# Altium PCB ThietbiTN.PcbDoc
Units mm, origin at the board's own origin, x right, y up, seen from the top; angles counter-clockwise.
Board outline 65.46 x 32 mm, 2 copper layers (Top Layer, Bottom Layer); 45 components, 33 nets, 146 pads, 26 vias.
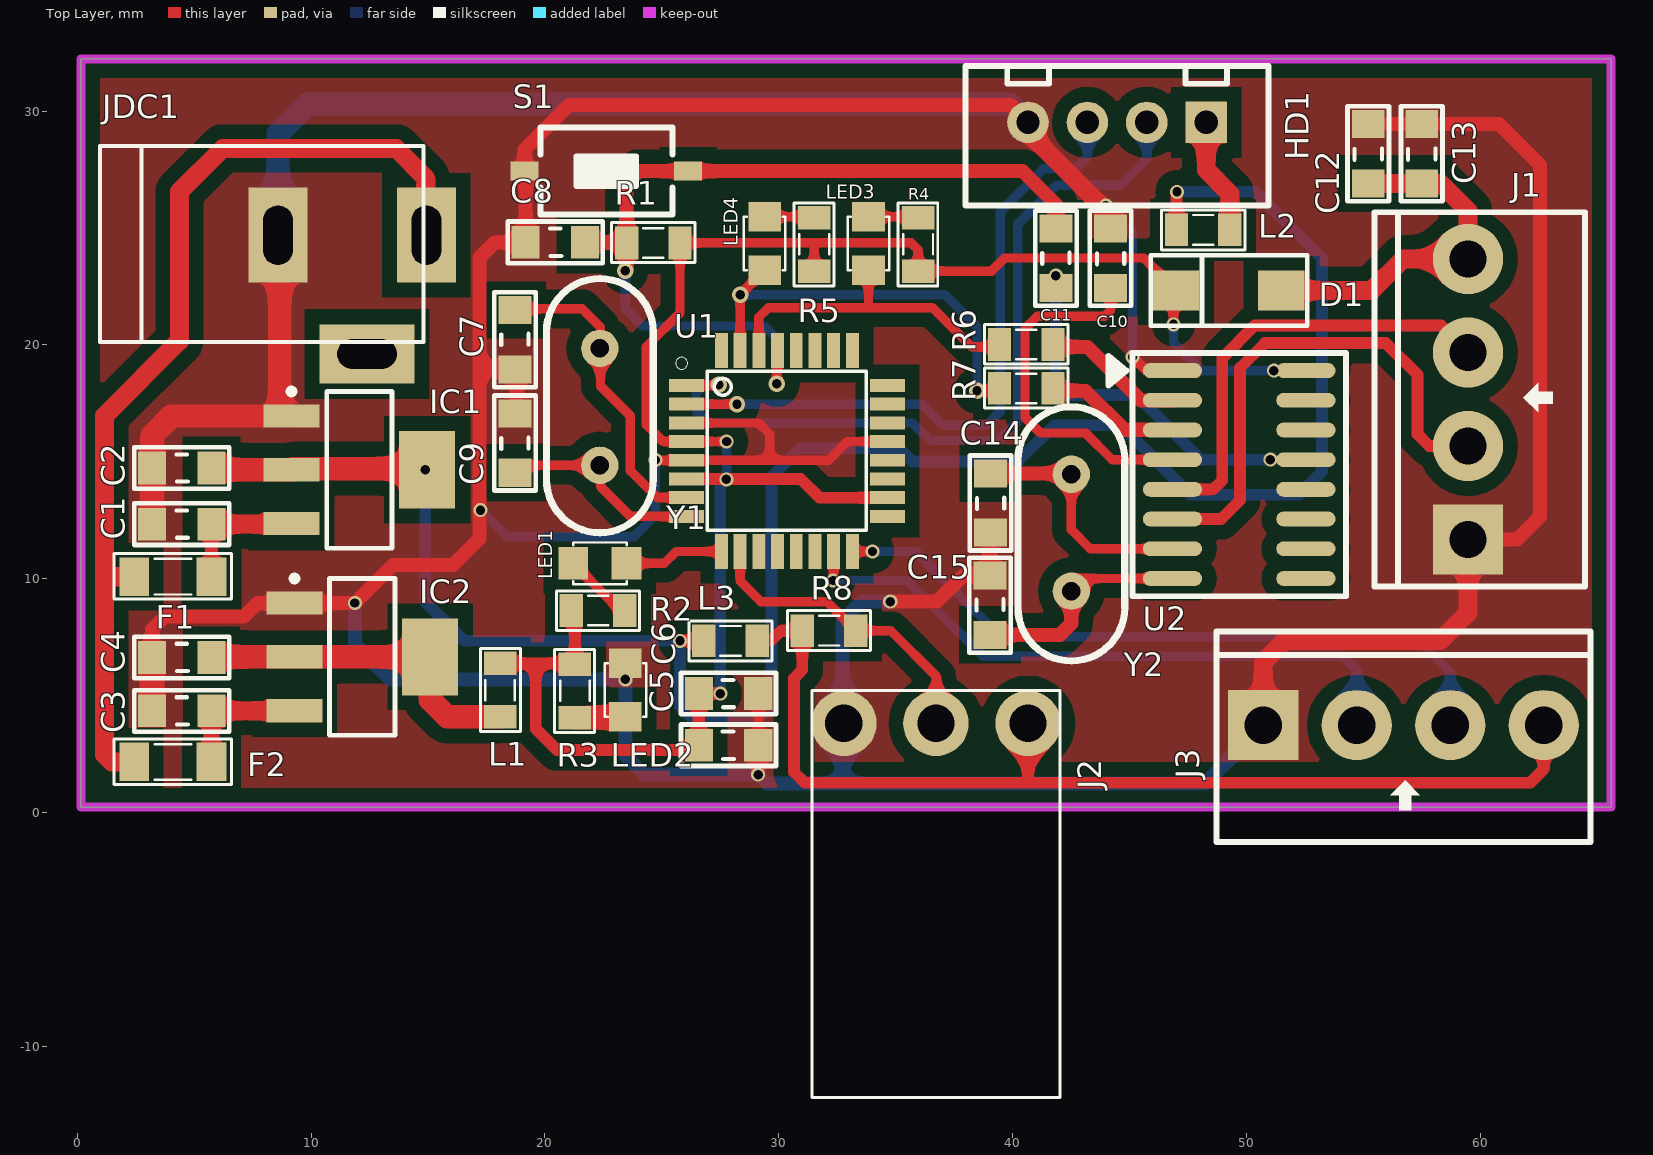
[diagram p0: Top Layer view]
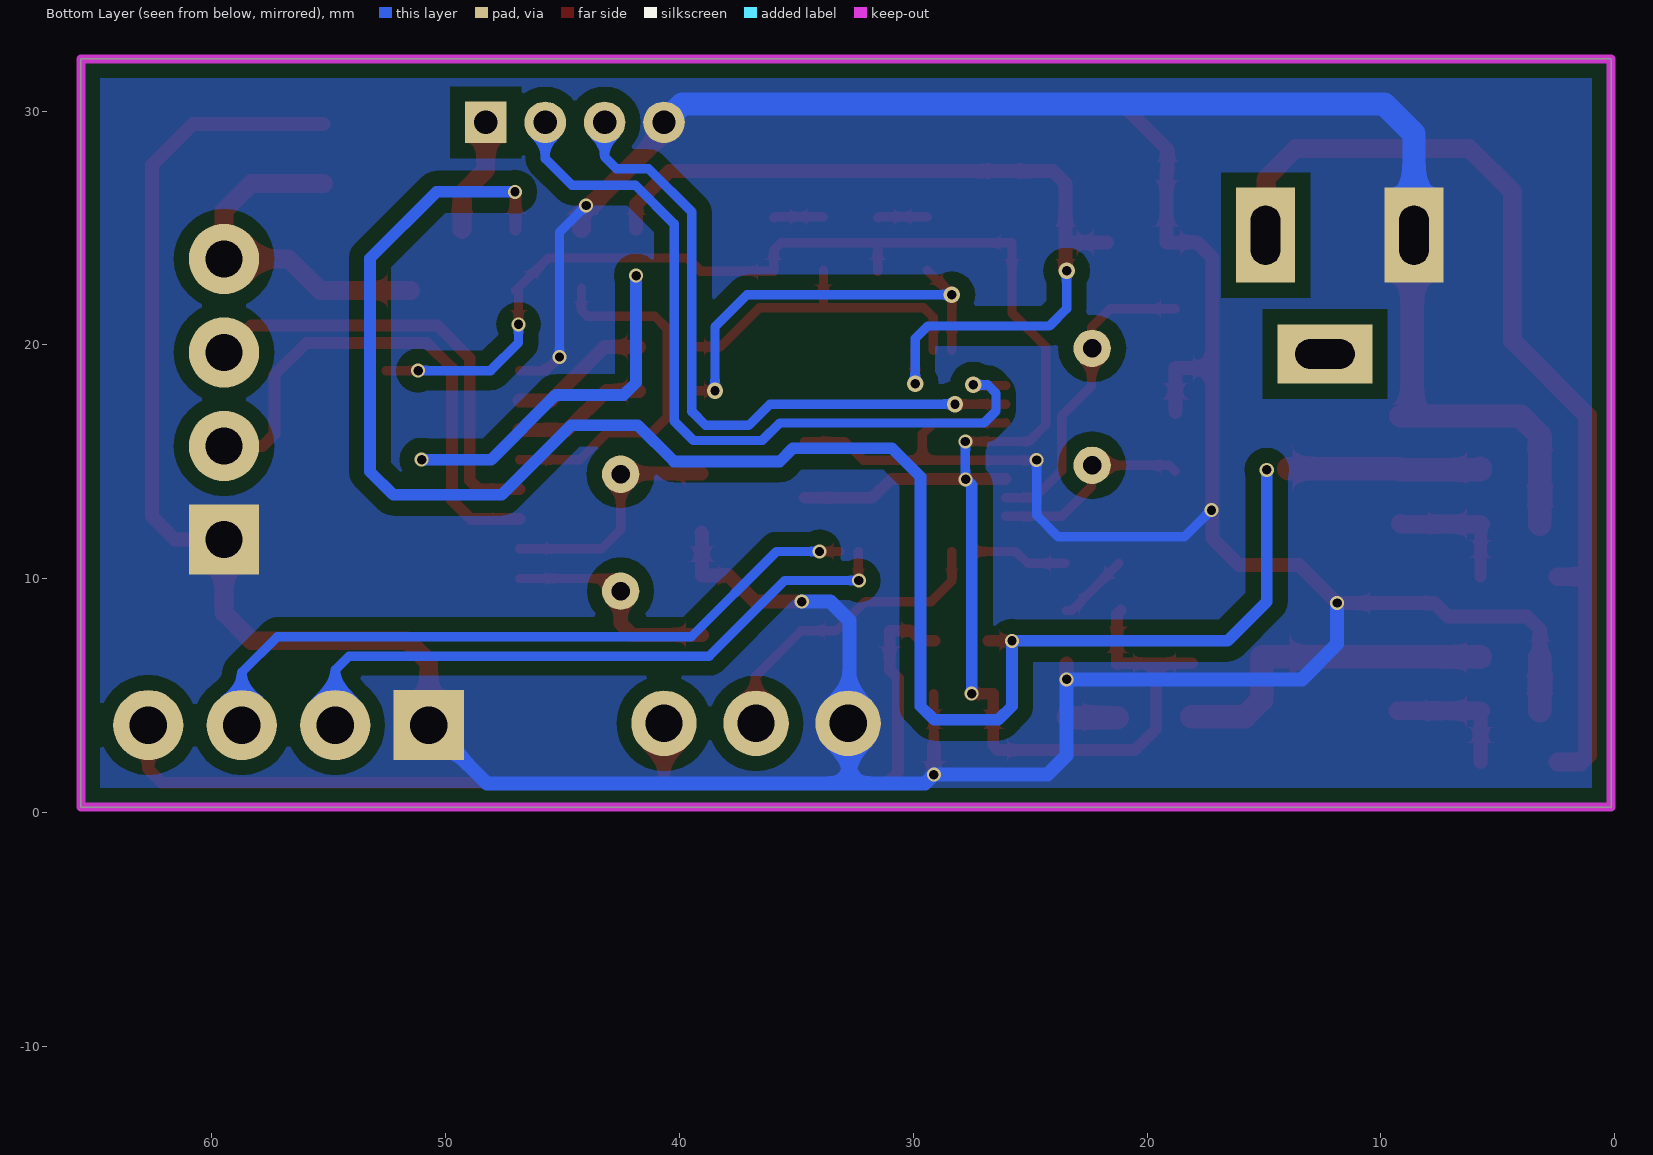
[diagram p1: Bottom Layer view, seen from below]
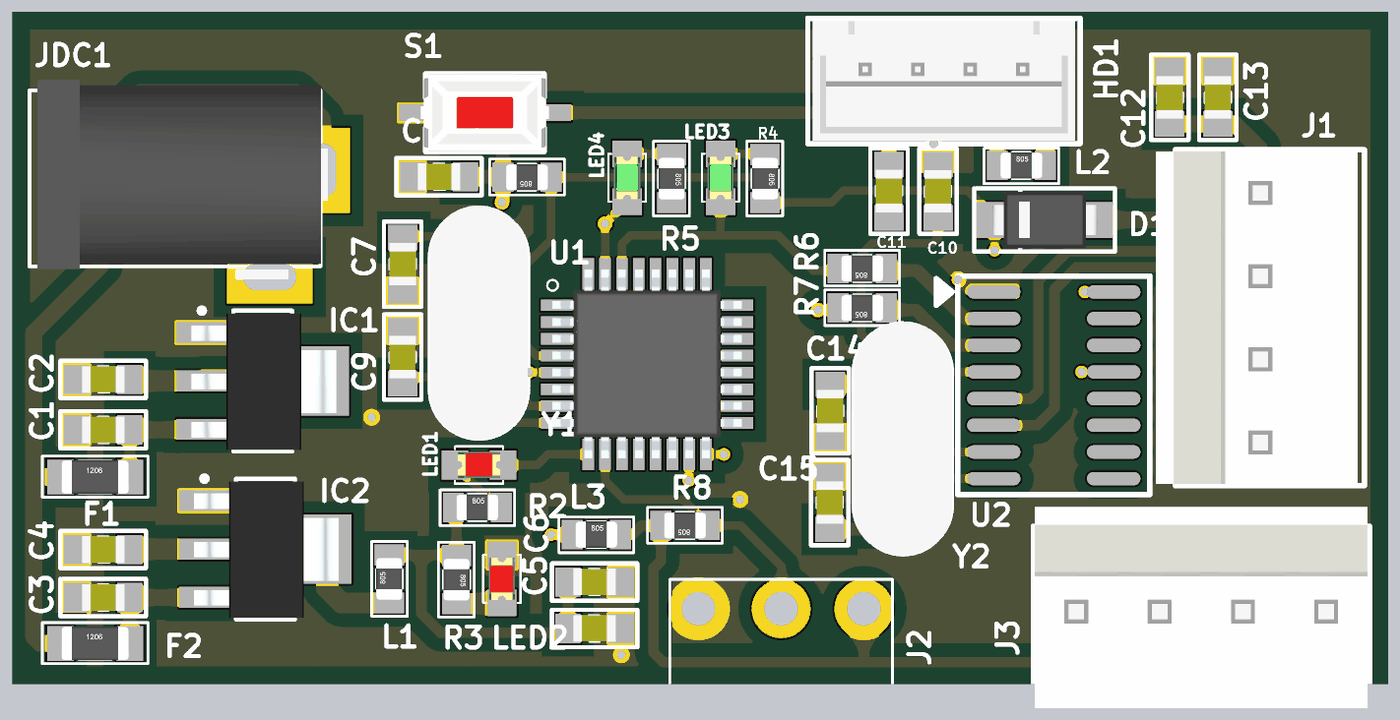
[diagram p2: 3D render of the assembled board from above, using the file's embedded part models]

## Layer stack, top to bottom
Top Solder: solder mask 0.0102, Solder Resist, Dk 3.5
Top Layer: signal copper 0.0356
Dielectric 1: dielectric 0.32, FR-4, Dk 4.8
Bottom Layer: signal copper 0.0356
Bottom Solder: solder mask 0.0102, Solder Resist, Dk 3.5

## Board outline
0.152,0.229 65.608,0.229 65.608,32.233 0.152,32.233

## Design rules (kind name [scope] priority, off if disabled: settings)
Clearance [All] p1: gap=0.254 ignorepadtopadclearanceinfootprint=FALSE except(0: Arc-Hole Track-Hole SMDPad-Hole THPad-Hole Via-Hole Fill-Hole Poly-Hole Region-Hole Text-Hole; 0.635: Arc-Fill Arc-Poly Arc-Region Track-Fill Track-Poly Track-Region SMDPad-Fill SMDPad-Poly SMDPad-Region THPad-Fill THPad-Poly THPad-Region Via-Fill Via-Poly Via-Region Fill-Fill Fill-Poly Fill-Region Poly-Poly Poly-Region Region-Region)
PolygonConnect [All] p1: connectstyle=Direct reliefconductorwidth=0.254 reliefentries=4 polygonreliefangle="90 Angle" airgapwidth=0.254
RoutingVias [All] p1: holewidth=0.6 width=0.8 viastyle="Through Hole" minholewidth=0.4 minwidth=0.6 maxholewidth=0.7 maxwidth=1
SolderMaskExpansion [All] p1: expansion=0.102
Width [All] p1: maxlimit=1 minlimit=0.25 preferedwidth=0.254
30 further rules are at their usual default settings.

## Classes and differential pairs
component class "U_[05] Sensor": J2 J3 L L3 R8 S
component class "U_[04] CH340": C10 C11 C14 C15 D1 J1 LED3 LED4 R4 R5 R6 R7 U2 Y2
component class "U_[03] HMI Screen": HD1 L2
component class "U_[02] MCU": C5 C6 C7 C8 C9 L1 LED1 LED2 R1 R2 R3 S1 U1 Y1
component class "U_[01] Power Supply": C1 C2 C3 C4 F1 F2 IC1 IC2 JDC1

## Components (designator, comment, footprint, x,y, rotation, side; value= is the part's Value field where it differs from the comment)
C1 "10uF/16V" CAP_0805 4.47,12.356 r0 top value=33p
C2 "10uF/16V" CAP_0805 4.47,14.757 r0 top value=33p
C3 "10uF/16V" CAP_0805 4.47,4.369 r0 top value=33p
C4 "10uF/16V" CAP_0805 4.47,6.655 r0 top value=33p
C5 "10uF" CAP_0805 27.856,2.847 r180 top value=33p
C6 "104" CAP_0805 27.856,5.056 r180 top value=33p
C7 "Capacitor Ceramic" CAP_0805 18.694,20.218 r90 top value=33p
C8 "10uF/16V" CAP_0805 20.447,24.409 r0 top value=33p
C9 "Capacitor Ceramic" CAP_0805 18.745,15.799 r270 top value=33p
C10 "104" CAP_0805 44.221,23.698 r270 top value=33p
C11 "104" CAP_0805 41.834,23.698 r90 top value=33p
C12 "104" CAP_0805 55.245,28.169 r270 top value=33p
C13 "10uF" CAP_0805 57.531,28.169 r270 top value=33p
C14 "22pF" CAP_0805 39.091,13.233 r270 top value=33p
C15 "22pF" CAP_0805 39.014,8.865 r90 top value=33p
D1 "1N5819" "DO-214AB SMA" 51.41,22.327 r180 top value=1N4007
F1 "Fuse" RES-SMD-1206 4.089,10.084 r0 top
F2 "Fuse" RES-SMD-1206 4.089,2.159 r0 top
HD1 "HMI" CON_4P 48.285,29.515 r180 top
IC1 "LM1117-5V" SOT223-4N 12.065,14.656 r0 top value=LM317
IC2 "LM1117-5V" SOT223-4N 12.192,6.655 r0 top value=LM317
J1 "PWR" Hed4V_3.96 59.485,11.672 r90 top value="Header 4"
J2 "DS18B20" KF3-3.96-T1 36.728,3.81 r0 top
J3 "HX711" Hed4V_3.96 50.725,3.734 r0 top value="Header 4"
JDC1 "Jac DC" DC-IN 11.76,22.149 r0 top
L1 "100uH" RES-SMD-0805 18.085,5.232 r90 top value="150 mH"
L2 "100uH" RES-SMD-0805 48.158,24.917 r0 top value="150 mH"
L3 "100uH" RES-SMD-0805 27.94,7.341 r0 top value="150 mH"
LED1 "LED" LED-0805-Red 21.209,10.655 r0 top value="LED 3 ly Single Colour"
LED2 "LED" LED-0805-Red 23.444,4.089 r90 top value="LED 3 ly Single Colour"
LED3 "LED" LED-0805-Green 33.845,25.478 r270 top value="LED 3 ly Single Colour"
LED4 "LED" LED-0805-Green 29.4,25.478 r270 top value="LED 3 ly Single Colour"
R1 "10k" RES-SMD-0805 24.638,24.359 r180 top
R2 "1k" RES-SMD-0805 22.276,8.636 r0 top
R3 "1k" RES-SMD-0805 21.285,5.196 r270 top
R4 "1k" RES-SMD-0805 35.966,24.297 r270 top
R5 "1k" RES-SMD-0805 31.521,24.297 r270 top
R6 "1k" RES-SMD-0805 40.589,20.015 r180 top
R7 "1k" RES-SMD-0805 40.589,18.136 r180 top
R8 "4k7" RES-SMD-0805 32.156,7.772 r180 top
S1 "SW-SMD" SW-SMD 22.631,27.432 r180 top
U1 "ATmega328-AU" "TQFP 32" 30.353,15.519 r0 top
U2 "CH340G" SO16 49.699,14.453 r0 top
Y1 "8Mhz" XTAL 22.352,17.399 r90 top
Y2 "12MHz" XTAL 42.52,11.913 r270 top

## Footprints (in the part's own frame and the unit in brackets; to place one, negate y for a bottom-side part, rotate by r counter-clockwise, add the part's x,y. Pads: shape width x height; smd on the part's side, far side on the other; paste and mask are expansions set on the pad)
CAP_0805 [mm]
  rect 1.2x1.4 smd: 1(-1.27,-0.025) 2(1.27,-0.025)
  silkscreen extent -2.03,-0.91 2.03,0.86, body extent -1.01,-0.66 1.01,0.61, height 0.61
CON_4P [mil]
  rect 70x70 hole 39.37 unplated: 1(0,0)
  round 70 hole 39.37 unplated: 2(100,0) 3(200,0)
  round 70 hole 39.37 unplated mask+4: 4(300,0)
  silkscreen extent -105,-95 405,140, body extent -96,-90 396,134, height 276
DC-IN [mil] "Jac DC input"
  rect 100x160 hole 50 slot 100 at 90 deg: 1(125,100) 2(-125,100)
  rect 160x100 hole 50 slot 100 at 0 deg: 3(25,-100)
  silkscreen extent -425,-80 120,250, body extent -410,-105 134,269, height 434
"DO-214AB SMA" [mm]
  rect 2x1.7 smd: 1(-0.092,0) 2(4.408,0)
  silkscreen extent -1.2,-1.5 5.5,1.51, body extent -0.37,-1.35 4.63,1.35, height 2.28
Hed4V_3.96 [mm]
  rect 3x3 hole 1.6 mask+0.102: 1(0,0)
  round 3 hole 1.6 mask+0.102: 2(4,0) 3(8,0) 4(12,0)
  silkscreen extent -2,-5 14,4, body extent -1.93,-4.67 13.91,4.93, height 13.9
KF3-3.96-T1 [mm] "3,96mm - modular - blue - Horizontal wire entry - Pressure clamp - 10mm height - 03p"
  round 2.8 hole 1.6: 1(-3.937,0) 2(0,0) 3(3.937,0)
  silkscreen extent -5.3,-16 5.3,1.4
LED-0805-Green [mil]
  rect 50x55 smd: 1(0,0) 2(90,0)
  silkscreen extent 0,-35 90,35, body extent 5,-25 85,25, height 43
LED-0805-Red [mil]
  rect 50x55 smd: 1(0,0) 2(90,0)
  silkscreen extent 0,-35 90,35, body extent 5,-25 85,25, height 43
RES-SMD-0805 [mil]
  rect 39.37x55 smd: 1(-45,0) 2(45,0)
  silkscreen extent -70,-34 70,33, body extent -39,-25 39,25, height 31
RES-SMD-1206 [mil]
  rect 50x65 smd: 1(-65,0) 2(65,0)
  silkscreen extent -99,-38 99,39, body extent -63,-31 63,32, height 40
SO16 [mm]
  oval 2.54x0.635 smd: 1(-2.854,4.445) 2(-2.854,3.175) 3(-2.854,1.905) 4(-2.854,0.635) 5(-2.854,-0.635) 6(-2.854,-1.905) 7(-2.854,-3.175) 8(-2.854,-4.445) 9(2.854,-4.445) 10(2.854,-3.175) 11(2.854,-1.905) 12(2.854,-0.635) 13(2.854,0.635) 14(2.854,1.905) 15(2.854,3.175) 16(2.854,4.445)
  silkscreen extent -5.59,-5.21 4.57,5.21, body extent -3.47,-4.95 3.47,4.95, height 1.75
SOT223-4N [mm] "SOT223, 4-Leads, Body 6.5x3.5mm, Pitch 2.3mm, Lead Span 7mm, IPC Medium Density"
  rect 2.4x1 smd: 1(-2.9,2.3) 2(-2.9,0) 3(-2.9,-2.3)
  rect 2.4x3.3 smd: 4(2.9,0)
  silkscreen extent -3.02,-3.35 1.4,3.47, body extent -3.39,-3.27 3.5,3.23, height 1.72
SW-SMD [mm] "Switch SMD type"
  rect 1.2x0.8 smd: 1(-3.5,0) 2(3.5,0)
  silkscreen extent -2.82,-1.85 2.82,1.85, body extent -3.05,-1.85 3.05,1.85, height 2.5
"TQFP 32" [mm] "TQFP 32 for ATmega328P"
  rect 1.5x0.55 smd: 1(-4.3,2.743) 2(-4.3,1.943) 3(-4.3,1.143) 4(-4.3,0.343) 5(-4.3,-0.457) 6(-4.3,-1.257) 7(-4.3,-2.057) 8(-4.3,-2.857) 17(4.3,-2.857) 18(4.3,-2.057) 19(4.3,-1.257) 20(4.3,-0.457) 21(4.3,0.343) 22(4.3,1.143) 23(4.3,1.943) 24(4.3,2.743)
  rect 0.55x1.5 smd: 9(-2.8,-4.357) 10(-2,-4.357) 11(-1.2,-4.357) 12(-0.4,-4.357) 13(0.4,-4.357) 14(1.2,-4.357) 15(2,-4.357) 16(2.8,-4.357) 25(2.8,4.243) 26(2,4.243) 27(1.2,4.243) 28(0.4,4.243) 29(-0.4,4.243) 30(-1.2,4.243) 31(-2,4.243) 32(-2.8,4.243)
  silkscreen extent -4.75,-3.46 3.4,3.95, body extent -4.5,-4.55 4.5,4.45, height 1.2
XTAL [mm]
  round 1.6 hole 0.8: 1(-2.552,0.001) 2(2.448,0.001)
  silkscreen extent -5.44,-2.29 5.44,2.29, body extent -5.55,-2.32 5.62,2.35, height 3.63

## Part data
C1 C2 C3 C4 C5 C6 C7 C8 C9 C10 C11 C12 C13 C14 C15: library part CapSMD, "Capacitor", LatestRevisionDate=17-Jul-2002, LatestRevisionNote="Re-released for DXP Platform.", PackageReference=RAD-0.3, Published=8-Jun-2000, Publisher="Altium Limited"
D1: library part D1A_1, "Diode 1A"
F1 F2 R1 R2 R3 R4 R5 R6 R7 R8: library part "Resistor - SMD", "Resistor", Manufacturer="Generic Components", Class=Passive, Published=08/06/2000, Publisher="Altium Hobart Technology Centre"
HD1: library part JP4, Manufacturer="W¨¹rth Elektronik eiSos GmbH", partNo=613004143121, ComponentLink1 Description=Manufacturer, ComponentLink1URL=http://www.we-online.com, ComponentLink2 Description=Datasheet, ComponentLink2URL=http://katalog.we-online.de/em/datasheet/6130xx143121.pdf, Created by="Karrer Zheng", Created Date="29 March 2013", NoPins=04
IC1 IC2: library part LM1117, "5V LDO"
J1 J3: library part Hed4, "Header 4 (Green)"
J2: library part KF3, Manufacturer="Würth Elektronik eiSos GmbH", partNo=691103110003, ComponentLink1 Description=Manufacturer, ComponentLink1URL=http://www.we-online.com, ComponentLink2 Description=Datasheet, ComponentLink2URL=http://katalog.we-online.de/em/datasheet/6911031100xx.pdf, Created by="Karrer Zheng", Created Date="29 October 2013", NoPins=3
JDC1: library part DCIN, "Jac DC input"
L1 L2 L3: library part Inductor, "Inductor"
LED1 LED2 LED3 LED4: "LED Single colour Green and Red"
S1: "Switch", LatestRevisionDate=17-Jul-2002, LatestRevisionNote="Re-released for DXP Platform.", PackageReference=SPST-2, Published=24-Mar-1999, Publisher="Altium Limited"
U1: "8-bit AVR Microcontroller, 32KB Flash, 1KB EEPROM, 2KB SRAM, 32-pin TQFP, Industrial Grade (-40°C to 85°C)", Code_JEDEC=MS-026-ABA, DatasheetVersion="revA, Jan-2010", PackageDescription="32-Lead, 7x7x1.0 mm Body, 0.8mm Lead Pitch, Thin Profile Plastic Quad Flat Package (TQFP)", PackageReference=32A, PackageVersion="revB, Oct-2001", Published=1-Apr-2010, Publisher="Altium Limited"
U2: "High and Low Side Driver", ComponentLink1Description="Manufacturer Link", ComponentLink1URL=http://www.irf.com/, ComponentLink2Description=Datasheet, ComponentLink2URL=http://www.irf.com/product-info/datasheets/data/ir2110.pdf, DatasheetVersion=PD60147J, LatestRevisionDate=04-Mar-2005, LatestRevisionNote="Stylized 3D Model Added.", Note="Pins 4, 8 and 14 are not connected", PackageDescription="DIP; 14 Leads; Row Spacing 7.62 mm; Pitch 2.54 mm", PackageReference=PDIP14, Published=8-Jun-2000, Publisher="Altium Limited"
Y1 Y2: library part XTAL, "Crystal Oscillator", LatestRevisionDate=17-Jul-2002, LatestRevisionNote="Re-released for DXP Platform.", PackageReference=R38, Published=8-Jun-2000, Publisher="Altium Limited"

## Via types
v1: diameter 0.6, hole 0.4, Top Layer to Bottom Layer, 20 vias
v2: diameter 0.7, hole 0.4, Top Layer to Bottom Layer, 6 vias

## Nets (pads, with @x,y where several pads share a name; then routed paths per layer and width w, separated by ;. In a path a pad name is that pad's centre, name@x,y a point inside that pad or via, vN(x,y) a via of type N, cw(c..) or ccw(c..) an arc to the next point about the centre after c; other vN are vias at no path point)
+5V-A: C2.2 IC1.2 IC1.4 L2.1 L3.1 | length 88.2
  Top Layer w0.5: v1(25.781,7.341) L3.1 ; L2.1 47.015,26.518 v1(47.041,26.543)
  Top Layer w1: C2.2 5.74,14.656 IC1.2 9.216,14.707 IC1.4@13.945,14.707
  Bottom Layer w0.5: v1(14.884,14.656) 14.884,9.017 16.561,7.341 v1(25.781,7.341) 25.781,4.547 26.365,3.962 29.108,3.962 29.693,4.547 29.693,14.351 30.912,15.57 35.154,15.57 35.712,15.011 40.234,15.011 41.783,16.561 44.628,16.561 47.6,13.589 52.248,13.589 53.238,14.58 53.238,23.698 50.394,26.543 v1(47.041,26.543)
+5V-B: C4.2 IC2.2 IC2.4 L1.1 | length 14.5
  Top Layer w1: C4.2 5.74,6.655 IC2.2 IC2.4 15.092,4.822 15.824,4.089 L1.1
+5V_HMI: HD1.1 L2.2 | length 5
  Top Layer w0.8: HD1.1 48.285,27.483 49.301,26.467 L2.2
+5V_MCU: C5.2 C6.2 D1.2 L1.2 R1.1 R2.1 R3.1 R4.2 R5.2 U1.4 U1.6 U1.18 U2.16 | length 83.7
  Top Layer w0.4: v1(27.775,15.862) U1.4 25.057,15.862 24.333,16.586 24.333,19.914 25.781,21.361 R1.1 31.598,24.359 ; R5.2 31.521,24.282 31.598,24.359 ; v1(46.888,20.879) 46.888,22.213 D1.2 45.613,23.716 39.667,23.716 39.105,23.154 R4.2 35.966,24.054 35.662,24.359 31.598,24.359 ; v1@51.079,18.898 v1(51.181,18.898) U2.16
  Top Layer w0.5: L1.2 19.609,6.375 ; R2.1 21.285,8.483 R3.1 21.249,6.375 19.609,6.375 ; U1.6 30.95,14.262 31.75,13.462 U1.18 ; v1(27.506,5.082) C6.2 C5.2 26.381,2.667 20.523,2.667 19.609,3.581 19.609,6.375
  Bottom Layer w0.4: v1@27.775,14.249 v1(27.775,15.862) ; v1(46.888,20.879) 46.888,20.091 48.082,18.898 v1(51.181,18.898)
  Bottom Layer w0.5: v1(27.506,5.082) 27.506,13.994 v1(27.762,14.249) v1@27.775,14.249
+5V_SEN: J2.3 J3.4 L3.2 R8.2 | length 45.8
  Top Layer w0.5: L3.2 29.667,7.341 30.099,7.772 R8.2 31.013,6.096 30.658,5.74 30.658,1.727 31.115,1.27 40.665,1.27 ; J2.3@40.259,3.81 J2.3@40.665,3.404 ; J2.3 J2.3@40.665,3.404 ; J3.4 62.725,1.841 62.154,1.27 40.716,1.27 40.665,1.321 J2.3@40.665,3.404
+5V_USB: C12.2 C13.2 D1.1 J1.4 | length 15.3
  Top Layer w0.8: D1.1 55.372,22.327 56.717,23.672 J1.4 59.485,25.732 58.318,26.899 C13.2 C12.2
+9V: F1.1 F2.1 JDC1.1 | length 42.7
  Top Layer w0.8: F2.1 1.473,2.159 1.168,2.464 1.168,9.881 ; F1.1 1.372,10.084 1.168,9.881 ; JDC1.1@15.57,24.74 14.91,25.4 14.91,27.127 13.64,28.397 6.223,28.397 4.369,26.543 4.369,20.168 1.168,16.967 1.168,9.881
CH340_RX: LED3.2 R6.2 U1.30 | length 14.2
  Top Layer w0.4: U1.30 29.153,21.177 29.566,21.59 33.884,21.59 ; LED3.2 33.845,21.628 33.884,21.59 ; R6.2@39.446,19.914 38.252,19.914 36.576,21.59 33.884,21.59
CH340_TX: LED4.2 R7.2 U1.31 | length 18.3
  Top Layer w0.4: U1.31 v2(28.353,22.145) LED4.2 ; v2(38.481,18.034) R7.2@39.446,18.034
  Bottom Layer w0.4: v2(28.353,22.145) 37.114,22.145 38.481,20.777 v2(38.481,18.034)
D+: J1.3 U2.5 | length 19.1
  Top Layer w0.5: U2.5 48.59,13.818 48.971,14.199 48.971,19.431 50.37,20.83 58.327,20.83 J1.3
D-: J1.2 U2.6 | length 22.4
  Top Layer w0.5: U2.6 48.92,12.548 49.733,13.36 49.733,19.009 50.8,20.076 55.972,20.076 57.328,18.72 57.328,16.18 57.836,15.672 J1.2
DS18_DAT: J2.2 R8.1 U1.10 | length 13.5
  Top Layer w0.4: U1.10 28.353,9.899 29.235,9.017 32.055,9.017 R8.1 34.798,7.772 36.754,5.817 36.754,4.242 J2.2@36.322,3.81
GND: C1.1 C2.1 C3.1 C4.1 C5.1 C6.1 C7.1 C8.1 C9.1 C10.1 C12.1 C13.1 C14.2 C15.2 HD1.4 IC1.1 IC2.1 J1.1 J2.1 J3.1 JDC1.2 LED2.2 S1.2 U1.3 U1.5 U1.21 U2.1 | length 267.7
  Top Layer w0.4: v1(24.726,15.076) 24.74,15.062 U1.5 29.616,15.062 ; U1.3 26.057,16.658 29.138,16.658 29.616,16.18 29.616,15.062 ; C5.1 C6.1 ; U1.21 32.931,15.862 32.131,15.062 29.616,15.062 ; v1(45.136,19.482) 45.72,18.898 U2.1
  Top Layer w0.6: C4.1 3.2,7.823 3.759,8.382 7.137,8.382 7.71,8.955 IC2.1 v1(11.876,8.955) 13.513,10.592 16.078,10.592 17.196,11.709 17.196,18.999 ; C9.1@18.796,17.12 18.796,18.999 17.196,18.999 ; v1(23.444,5.69) LED2.2 ; v1(29.126,1.618) C5.1 ; J2.1@32.399,4.343 J2.1@32.41,4.355 ; v1(34.773,9.017) 36.779,9.017 37.897,10.135 C15.2 39.04,11.938 C14.2 ; HD1.4 39.929,30.251 21.031,30.251 19.131,28.352 S1.2 19.177,27.386 C8.1 17.856,24.384 17.196,23.724 17.196,18.999 ; C12.1 C13.1 60.808,29.439 62.56,27.686 62.56,12.649 61.583,11.672 J1.1
  Top Layer w0.8: HD1.4 40.665,29.083 44.196,25.552 C10.1 ; J3.1 50.725,6.427 51.638,7.341 58.293,7.341 59.485,8.533 J1.1
  Top Layer w1: C3.1 C4.1 ; C1.1 C2.1 3.2,16.129 4.027,16.956 IC1.1@8.661,16.956 ; IC1.1 IC1.1@8.661,16.956 ; JDC1.2@9.22,24.74 8.661,24.181 IC1.1@8.661,16.956
  Bottom Layer w0.4: v1(17.247,12.929) 17.272,12.929 18.415,11.786 23.8,11.786 24.726,12.712 v1(24.726,15.076) ; v1(43.993,25.959) 45.136,24.816 v1(45.136,19.482)
  Bottom Layer w0.6: v1(11.876,8.955) 11.876,7.2 13.386,5.69 v1(23.444,5.69) 23.444,2.438 24.265,1.618 v1(29.126,1.618) 29.5,1.245 32.741,1.245 ; v1(34.773,9.017) 33.553,9.017 32.741,8.204 32.741,1.245 ; J3.1 48.236,1.245 32.741,1.245
  Bottom Layer w1: JDC1.2 8.585,29.032 9.855,30.302 39.878,30.302 HD1.4
HMI_RX: HD1.2 U1.1 | length 34.6
  Top Layer w0.4: U1.1 27.432,18.262 v2(27.432,18.288)
  Bottom Layer w0.4: v2(27.432,18.288) 26.822,18.288 26.467,17.932 26.467,17.17 26.979,16.658 35.716,16.658 36.468,15.907 39.402,15.907 40.234,16.739 40.234,25.171 41.885,26.822 44.602,26.822 45.745,27.965 HD1.2
HMI_TX: HD1.3 U1.2 | length 28.9
  Top Layer w0.4: U1.2 v2(28.219,17.462)
  Bottom Layer w0.4: v2@28.219,17.577 v2(28.219,17.462) 36.132,17.462 37.033,16.561 38.887,16.561 39.472,17.145 39.472,25.679 41.326,27.534 42.697,27.534 43.205,28.042 HD1.3
HX711_CLK: J3.2 U1.15 | length 27.6
  Top Layer w0.4: v1(32.334,9.918) 32.353,9.899 U1.15
  Bottom Layer w0.4: v1(32.334,9.918) 35.497,9.918 38.735,6.68 54.141,6.68 54.725,6.096 J3.2
HX711_DAT: J3.3 U1.16 | length 30
  Top Layer w0.4: U1.16 v1(34.011,11.162)
  Bottom Layer w0.4: v1(34.011,11.162) 35.853,11.162 39.497,7.518 57.201,7.518 58.725,5.994 J3.3
NetC1_2: C1.2 F1.2 IC1.3 | length 5.7
  Top Layer w0.5: F1.2 C1.2
  Top Layer w0.8: C1.2 9.14,12.33 IC1.3
NetC3_2: C3.2 F2.2 IC2.3 | length 5.7
  Top Layer w0.6: F2.2 C3.2 ; IC2.3@9.281,4.343 IC2.3
  Top Layer w0.8: C3.2 IC2.3@9.281,4.343
NetC7_2: C7.2 U1.7 Y1.2 | length 13.4
  Top Layer w0.4: C7.2@18.796,21.539 21.59,21.539 22.377,20.753 22.377,18.238 23.66,16.955 23.66,14.618 24.815,13.462 U1.7
NetC9_2: C9.2 U1.8 Y1.1 | length 9.1
  Top Layer w0.4: C9.2@18.796,14.58 19.064,14.847 22.148,14.847 22.377,15.076 22.377,13.945 23.66,12.662 U1.8
NetC10_2: C10.2 U2.4 | length 15.8
  Top Layer w0.4: C10.2 44.196,21.482 43.935,21.222 41.059,21.222 40.538,20.701 40.538,16.891 41.199,16.231 43.129,16.231 44.272,15.088 U2.4
NetC11_1: C11.1 U2.13 | length 15.1
  Bottom Layer w0.5: v1(41.859,22.962) 41.859,18.39 42.393,17.856 45.288,17.856 48.057,15.088 v1(51.029,15.088)
NetC14_1: C14.1 U2.7 Y2.1 | length 10.5
  Top Layer w0.4: Y2.1 42.52,12.09 43.332,11.278 U2.7
  Top Layer w0.5: Y2.1@42.481,14.503 Y2.1
  Top Layer w0.6: C14.1 Y2.1@42.481,14.503
NetC15_1: C15.1 U2.8 Y2.2 | length 9.6
  Top Layer w0.4: Y2.2 43.064,10.008 U2.8
  Top Layer w0.6: C15.1 42.024,7.595 42.52,8.091 Y2.2
NetLED1_1: LED1.1 R2.2 | length 3.1
  Top Layer w0.4: LED1.1 23.228,8.636 R2.2@23.47,8.636
NetLED2_1: LED2.1 R3.2 | length 2.1
  Top Layer w1: R3.2 23.343,4.053 LED2.1@23.381,4.091
NetLED3_1: LED3.1 R4.1 | length 2.1
  Top Layer w0.4: LED3.1 35.928,25.478 R4.1
NetLED4_1: LED4.1 R5.1 | length 2.1
  Top Layer w0.4: LED4.1 31.483,25.478 R5.1
NetR6_1: R6.1 U2.2 | length 6.1
  Top Layer w0.6: R6.1@41.732,19.914 43.205,19.914 45.491,17.628 U2.2
NetR7_1: R7.1 U2.3 | length 5.8
  Top Layer w0.6: R7.1@41.732,18.034 43.129,18.034 44.806,16.358 U2.3
RESET: C8.2 C11.2 R1.2 S1.1 U1.29 | length 37.8
  Top Layer w0.4: v2(29.921,18.339) 29.921,19.731 U1.29
  Top Layer w0.5: R1.2@23.47,24.384 R1.2
  Top Layer w0.6: C8.2 R1.2@23.47,24.384 ; v2(23.444,23.165) 23.495,23.216 R1.2 23.495,26.899 24.028,27.432 S1.1 40.437,27.432 41.859,26.01 C11.2
  Bottom Layer w0.4: v2(23.444,23.165) 23.444,21.539 24.181,20.803 29.388,20.803 29.921,20.269 v2(29.921,18.339)
USER_LED: LED1.2 U1.9 | length 4.3
  Top Layer w0.4: LED1.2 25.108,10.655 25.615,11.162 U1.9
pads on no net: JDC1.3 U1.11 U1.12 U1.13 U1.14 U1.17 U1.19 U1.20 U1.22 U1.23 U1.24 U1.25 U1.26 U1.27 U1.28 U1.32 U2.9 U2.10 U2.11 U2.12 U2.14 U2.15

## Polygon pours and split planes (outlines as drawn)
GND on Bottom Layer "GND" (solid, remove dead copper, pour order 2): 0.229,32.233 0.279,32.283 65.659,32.283 65.659,0.178 65.608,0.127 65.507,0.229 0.127,0.229 0.127,32.182 0.178,32.233
GND on Top Layer "TOP GND" (solid, remove dead copper, pour order 0): 0.152,32.233 65.608,32.233 65.608,0.229 0.305,0.229 0.305,32.08

## Keep-outs
Keep-Out Layer:
  the board outline again, w0.381